# EAGLE board CT_schematic (EAGLE 7.6.0)

Size 100 x 80 mm. Coordinates in mm from the lower left corner, seen from the top.
Outline: 0,0 100,0 100,80 0,80 0,0
Copper layers (1*16): Top 0.035mm / dielectric 1.5mm / Bottom 0.035mm
Design rules "default": minimum track width 10mil, minimum drill 24mil, track to track 8mil, track to pad 8mil, pad to pad 8mil, via to via 8mil, smd to smd 8mil, copper to edge 40mil, drill to drill 8mil, minimum pad ring 10mil, minimum via ring 8mil, stop-mask expansion 4mil, vias tented up to drill 0mil, thermal gap 10mil

## Footprints (pad centres in the part's own frame; a part is rotated, then mirrored left to right if it is on the bottom)
C0603 = smd 0.8 x 0.8: 1 -0.762,0; 2 0.762,0
C0402 = smd 0.5 x 0.5: 1 -0.508,0; 2 0.508,0
C0805 = smd 1.2 x 1.3: 1 -1.016,0; 2 1.016,0
C1206 = smd 1.3 x 1.6: 1 -1.524,0; 2 1.524,0
L0603 = smd 0.8 x 0.8: 1 -0.762,0; 2 0.762,0
DR1040 = smd 1.6 x 3.2: 1 -4.458,0; 2 4.458,0
R0603 = smd 0.8 x 0.8: 1 -0.762,0; 2 0.762,0
LQFP100 = smd 0.3 x 1.2: 1 -6,-7.75; 2 -5.5,-7.75; 3 -5,-7.75; 4 -4.5,-7.75; 5 -4,-7.75; 6 -3.5,-7.75; 7 -3,-7.75; 8 -2.5,-7.75; 9 -2,-7.75; 10 -1.5,-7.75; 11 -1,-7.75; 12 -0.5,-7.75; 13 0,-7.75; 14 0.5,-7.75; 15 1,-7.75; 16 1.5,-7.75; 17 2,-7.75; 18 2.5,-7.75; 19 3,-7.75; 20 3.5,-7.75; 21 4,-7.75; 22 4.5,-7.75; 23 5,-7.75; 24 5.5,-7.75; 25 6,-7.75; 51 6,7.75; 52 5.5,7.75; 53 5,7.75; 54 4.5,7.75; 55 4,7.75; 56 3.5,7.75; 57 3,7.75; 58 2.5,7.75; 59 2,7.75; 60 1.5,7.75; 61 1,7.75; 62 0.5,7.75; 63 0,7.75; 64 -0.5,7.75; 65 -1,7.75; 66 -1.5,7.75; 67 -2,7.75; 68 -2.5,7.75; 69 -3,7.75; 70 -3.5,7.75; 71 -4,7.75; 72 -4.5,7.75; 73 -5,7.75; 74 -5.5,7.75; 75 -6,7.75 | smd 1.2 x 0.3: 26 7.75,-6; 27 7.75,-5.5; 28 7.75,-5; 29 7.75,-4.5; 30 7.75,-4; 31 7.75,-3.5; 32 7.75,-3; 33 7.75,-2.5; 34 7.75,-2; 35 7.75,-1.5; 36 7.75,-1; 37 7.75,-0.5; 38 7.75,0; 39 7.75,0.5; 40 7.75,1; 41 7.75,1.5; 42 7.75,2; 43 7.75,2.5; 44 7.75,3; 45 7.75,3.5; 46 7.75,4; 47 7.75,4.5; 48 7.75,5; 49 7.75,5.5; 50 7.75,6; 76 -7.75,6; 77 -7.75,5.5; 78 -7.75,5; 79 -7.75,4.5; 80 -7.75,4; 81 -7.75,3.5; 82 -7.75,3; 83 -7.75,2.5; 84 -7.75,2; 85 -7.75,1.5; 86 -7.75,1; 87 -7.75,0.5; 88 -7.75,0; 89 -7.75,-0.5; 90 -7.75,-1; 91 -7.75,-1.5; 92 -7.75,-2; 93 -7.75,-2.5; 94 -7.75,-3; 95 -7.75,-3.5; 96 -7.75,-4; 97 -7.75,-4.5; 98 -7.75,-5; 99 -7.75,-5.5; 100 -7.75,-6
LGA-12 = smd 0.35 x 0.3: 1 -0.8,0.75; 2 -0.8,0.25; 3 -0.8,-0.25; 4 -0.8,-0.75; 7 0.8,-0.75; 8 0.8,-0.25; 9 0.8,0.25; 10 0.8,0.75 | smd 0.3 x 0.35: 5 -0.25,-0.8; 6 0.25,-0.8; 11 0.25,0.8; 12 -0.25,0.8
FCI_10118193-0001LF = smd 0.4 x 1.35: 1 -1.3,2.675; 2 -0.65,2.675; 3 0,2.675; 4 0.65,2.675; 5 1.3,2.675 | smd 1.6 x 1.4: 6 -3.2,2.45; 7 3.2,2.45 | smd 1.9 x 1.9: 8 -1.2,0; 9 1.2,0 | hole 0.5: -3.3,0; 3.3,0
SOT143B = smd 1 x 0.7: 1 -0.75,-1 | smd 0.6 x 0.7: 2 0.95,-1; 3 0.95,1; 4 -0.95,1
ABS07-32.768KHZ-7-T = smd 1.1 x 2.4: 1 -2.5,0; 2 0,0
ABLS-25.000MHZ-B2F-T = smd 5.6 x 2.8: 1 -3.81,0; 2 5.69,0
TSOT-23-5 = smd 1.3 x 0.62: 1 -1.31,0.95; 2 -1.31,0; 3 -1.31,-0.95; 4 1.31,-0.95; 5 1.31,0.95
DFN8_2X3MC = smd 0.813 x 0.305: 1 -1.398,0.75; 2 -1.398,0.25; 3 -1.398,-0.25; 4 -1.398,-0.75; 5 1.398,-0.75; 6 1.398,-0.25; 7 1.398,0.25; 8 1.398,0.75 | smd 1.753 x 1.549: 9 0,0
JST-2-SMD = smd 1 x 4.6: 1 -1,-3.7; 2 1,-3.7 | smd 1.6 x 3.4: NC1 -3.4,1.5; NC2 3.4,1.5
SON-6 = smd 0.55 x 0.3: 1 -0.355,0.5 | smd 0.52 x 0.3: 2 -0.37,0; 3 -0.37,-0.5; 4 0.37,-0.5; 5 0.37,0; 6 0.37,0.5
SW_4-1437565-2 = smd 1.4 x 2.1: 1 -2.23,4.55; 2 -2.23,-4.55; 3 2.23,4.55; 4 2.23,-4.55
LGM67K-G1J2-24-Z = smd 0.8 x 1.4: A -2,0; C 0,0
NC7SZ125M5X = smd 1.3 x 0.7: 1 -1.3,0.95; 2 -1.3,0; 3 -1.3,-0.95; 4 1.3,-0.95; 5 1.3,0.95

## Placement (x,y rotation side)
C1  1e-06  [C0603]  -38.1,52.07 0 top  (outside the outline)
C2  1e-07  [C0603]  -41.91,52.07 0 top  (outside the outline)
C3  1e-07  [C0603]  -45.72,52.07 0 top  (outside the outline)
C4  1e-07  [C0603]  -49.53,52.07 0 top  (outside the outline)
C5  1e-07  [C0603]  -53.34,52.07 0 top  (outside the outline)
C6  1e-07  [C0603]  -57.15,52.07 0 top  (outside the outline)
C7  1e-07  [C0603]  -15.24,57.15 0 top  (outside the outline)
C8  4.7e-06  [C0603]  -34.29,52.07 0 top  (outside the outline)
C9  1e-08  [C0603]  -19.05,57.15 0 top  (outside the outline)
C10  1e-06  [C0603]  -22.86,57.15 0 top  (outside the outline)
C11  1e-11  [C0402]  -49.53,57.15 0 top  (outside the outline)
C12  1e-11  [C0402]  -53.34,57.15 0 top  (outside the outline)
C13  1e-11  [C0402]  -57.15,57.15 0 top  (outside the outline)
C14  1e-11  [C0402]  -15.24,62.23 0 top  (outside the outline)
C15  1e-05  [C0805]  -46.99,39.37 0 top  (outside the outline)
C16  1e-07  [C0402]  -19.05,62.23 0 top  (outside the outline)
C17  1e-07  [C0402]  -22.86,62.23 0 top  (outside the outline)
C18  1e-05  [C0805]  -52.07,39.37 0 top  (outside the outline)
C19  1e-05  [C0805]  -57.15,39.37 0 top  (outside the outline)
C20  1e-07  [C0402]  -26.67,62.23 0 top  (outside the outline)
C21  1e-05  [C1206]  -29.21,39.37 0 top  (outside the outline)
C22  1e-05  [C1206]  -35.56,39.37 0 top  (outside the outline)
C23  1e-08  [C0402]  -30.48,62.23 0 top  (outside the outline)
F1  240.0  [L0603]  -26.67,57.15 0 top  (outside the outline)
I1  5.2e-06  [DR1040]  -19.05,22.86 0 top  (outside the outline)
R2  1000.0  [R0603]  -30.48,57.15 0 top  (outside the outline)
R4  4700.0  [R0603]  -34.29,57.15 0 top  (outside the outline)
R5  2200.0  [R0603]  -38.1,57.15 0 top  (outside the outline)
R6  2200.0  [R0603]  -41.91,57.15 0 top  (outside the outline)
R7  10000.0  [R0603]  -53.34,46.99 0 top  (outside the outline)
R8  10000.0  [R0603]  -58.42,46.99 0 top  (outside the outline)
R9  309473.68421053  [R0603]  -33.02,46.99 0 top  (outside the outline)
R10  1000000.0  [R0603]  -38.1,46.99 0 top  (outside the outline)
R11  10000.0  [R0603]  -15.24,52.07 0 top  (outside the outline)
R12  10000.0  [R0603]  -20.32,52.07 0 top  (outside the outline)
R13  18000.0  [R0603]  -25.4,52.07 0 top  (outside the outline)
R14  470000.0  [R0603]  -43.18,46.99 0 top  (outside the outline)
R15  120000.0  [R0603]  -48.26,46.99 0 top  (outside the outline)
R16  2000.0  [R0603]  -45.72,57.15 0 top  (outside the outline)
R17  10000.0  [R0603]  -30.48,52.07 0 top  (outside the outline)
U1  STM32F302VCT6  [LQFP100]  -24.13,8.89 0 top  (outside the outline)
U2  LIS2HH12TR  [LGA-12]  -17.78,46.99 0 top  (outside the outline)
U3  10118193-0001LF  [FCI_10118193-0001LF]  -45.72,21.59 0 top  (outside the outline)
U4  prtr5v0u2ax  [SOT143B]  -43.18,62.23 0 top  (outside the outline)
U5  ABS07-32.768KHZ-7-T  [ABS07-32.768KHZ-7-T]  -49.53,31.75 0 top  (outside the outline)
U6  ABLS-25.000MHZ-B2F-T  [ABLS-25.000MHZ-B2F-T]  -26.67,33.02 0 top  (outside the outline)
U7  ltc3406es5  [TSOT-23-5]  -22.86,45.72 0 top  (outside the outline)
U8  MCP73831T-2ACI/MC  [DFN8_2X3MC]  -53.34,60.96 0 top  (outside the outline)
U9  S2B-PH-SM4-TB(LF)(SN)  [JST-2-SMD]  -34.29,24.13 0 top  (outside the outline)
U10  TPS3895ADRYR  [SON-6]  -46.99,60.96 0 top  (outside the outline)
U11  4-1437565-2  [SW_4-1437565-2]  -48.26,6.35 0 top  (outside the outline)
U12  Q65110A2395  [LGM67K-G1J2-24-Z]  -17.78,40.64 0 top  (outside the outline)
U13  nc7sz125m5x  [NC7SZ125M5X]  -40.64,39.37 0 top  (outside the outline)

## Library data of the parts
C1-C23 F1 I1 R2 R4-R17 U1-U13 = circuit_tree

## Nets
CLK_CRYSTAL_U1_8: C11.1 U1.8 U5.1
CLK_CRYSTAL_U1_9: C12.1 U1.9 U5.2
CLK_CRYSTAL_U1_12: C13.1 U1.12 U6.1
CLK_CRYSTAL_U1_13: C14.1 U1.13 U6.2
GND: C1.2 C2.2 C3.2 C4.2 C5.2 C6.2 C7.2 C8.2 C9.2 C10.2 C11.2 C12.2 C13.2 C14.2 C15.2 C16.2 C17.2 C18.2 C19.1 C19.2 C20.2 C21.2 C22.2 C23.2 R2.2 R7.2 R9.2 R13.2 R15.2 R16.2 U1.20 U1.49 U1.74 U1.99 U2.5 U2.6 U2.7 U2.8 U3.5 U3.6 U3.7 U3.8 U3.9 U4.1 U7.2 U8.6 U8.9 U9.2 U10.2 U12.C U13.1 U13.3
INPUT_USBPOWER_5V: C21.1 R17.2 U3.1 U4.4 U8.1 U8.2
NET_U1_14: R4.1 U1.14 U13.4
NET_U1_22: C9.1 C10.1 F1.1 U1.21 U1.22
NET_U1_76: R6.1 U1.76 U2.4
NET_U1_77: R5.1 U1.77 U2.1
NET_U1_94: R7.1 U1.94
NET_U1_97: U12.A
NET_U1_98: U11.3 U11.4
NET_U2_2: R8.1 U2.2
NET_U7_1: U7.1
NET_U7_3: I1.1 U7.3
NET_U7_5: R9.1 R10.1 U7.5
NET_U7_ATNET_3: I1.2 R10.2
NET_U8_5: R17.1 U8.5
NET_U8_8: R16.1 U8.8
NET_U10_1: R12.1 R13.1 U10.1
NET_U10_3: R14.2 R15.1 U10.3
NET_U10_4: R11.1 U10.4 U13.2
NET_U11_1: R2.1 U11.1 U11.2
PROC_USB_DM: U1.70 U3.2 U4.3
PROC_USB_DP: U1.71 U3.3 U4.2
VCC_S1_3V7: C18.1 C22.1 U7.4 U8.3 U8.4 U9.1
VCC_TIER1_2V5: C1.1 C2.1 C3.1 C4.1 C5.1 C6.1 C7.1 C8.1 C15.1 C16.1 C17.1 C19.2 C20.1 C23.1 F1.2 I1.2 R4.2 R5.2 R6.2 R8.2 R10.2 R11.2 R12.2 R14.1 U1.6 U1.28 U1.50 U1.75 U1.100 U2.9 U2.10 U10.6 U13.5

## Tracks (layer width: path | path; a pad name or v marks a point on that pad's centre or on a via)
CLK_CRYSTAL_U1_8  (2 unrouted)
CLK_CRYSTAL_U1_9  (2 unrouted)
CLK_CRYSTAL_U1_12  (2 unrouted)
CLK_CRYSTAL_U1_13  (2 unrouted)
GND  (51 unrouted)
INPUT_USBPOWER_5V  (5 unrouted)
NET_U1_14  (2 unrouted)
NET_U1_22  (4 unrouted)
NET_U1_76  (2 unrouted)
NET_U1_77  (2 unrouted)
NET_U1_94  (1 unrouted)
NET_U1_98  (1 unrouted)
NET_U2_2  (1 unrouted)
NET_U7_3  (1 unrouted)
NET_U7_5  (2 unrouted)
NET_U7_ATNET_3  (1 unrouted)
NET_U8_5  (1 unrouted)
NET_U8_8  (1 unrouted)
NET_U10_1  (2 unrouted)
NET_U10_3  (2 unrouted)
NET_U10_4  (2 unrouted)
NET_U11_1  (2 unrouted)
PROC_USB_DM  (2 unrouted)
PROC_USB_DP  (2 unrouted)
VCC_S1_3V7  (5 unrouted)
VCC_TIER1_2V5  (32 unrouted)